# Altium PCB BottomBoard.PcbDoc (part 2 of 2)
Units mm, origin at the board's own origin, x right, y up, seen from the top; angles counter-clockwise.
Board outline 200 x 100 mm, 4 copper layers (Top Layer, Internal Plane 1, Internal Plane 2, Bottom Layer), stack 0.462 mm thick; 152 components, 162 nets, 488 pads, 15 vias.
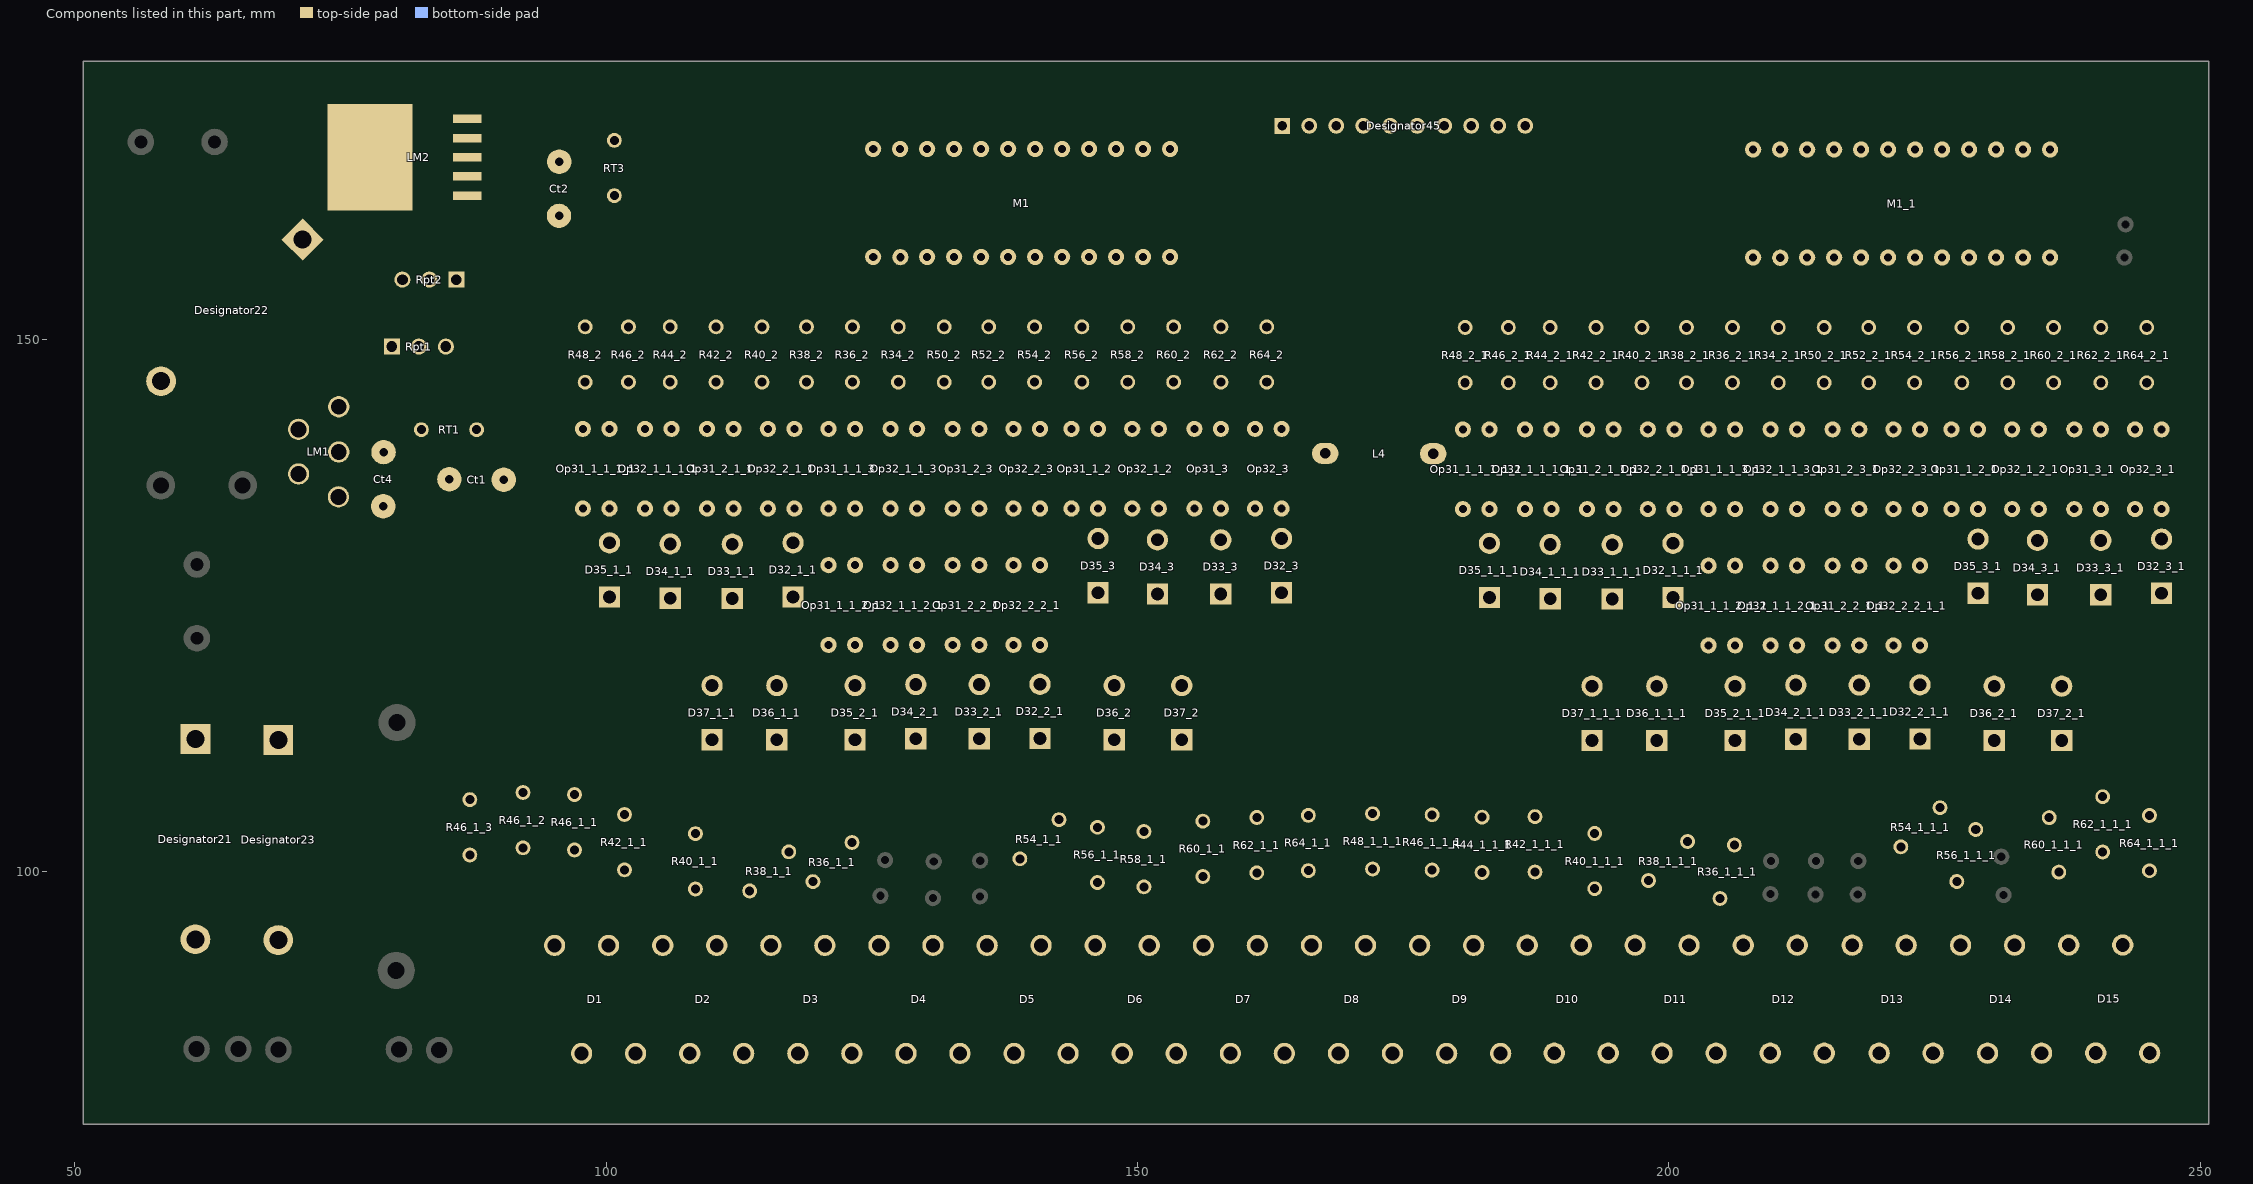
[diagram p4: the components of this part, seen from the top]

## Via types
v1: diameter 1, hole 0.7, Top Layer to Bottom Layer, 5 vias
v2: diameter 0.8, hole 0.5, Top Layer to Bottom Layer, 4 vias
v3: diameter 0.9, hole 0.6, Top Layer to Bottom Layer, 3 vias
v4: diameter 1, hole 0.65, Top Layer to Bottom Layer, 1 vias
v5: diameter 1.27, hole 0.711, Top Layer to Bottom Layer, 1 vias
v6: diameter 1, hole 0.6, Top Layer to Bottom Layer, 1 vias

## Nets (pads, with @x,y where several pads share a name; then routed paths per layer and width w, separated by ;. In a path a pad name is that pad's centre, name@x,y a point inside that pad or via, vN(x,y) a via of type N, cw(c..) or ccw(c..) an arc to the next point about the centre after c; other vN are vias at no path point) (continued)
copper on no net: | length 6655.3
  Top Layer w0.254: 64.831,136.3 65.796,136.3 ; 91.882,164.189 92.009,164.062 ; 103.616,139.653 103.656,139.693 ; 120.714,134.112 120.928,134.112 ; 120.888,139.653 120.928,139.693 ; 123.047,151.21 123.174,151.21 ; 123.174,133.811 123.174,134.112 ; 132.572,139.653 132.612,139.693 ; v2@136.763,132.722 v2(136.89,132.722) ; 138.287,139.653 138.327,139.693 ; 140.827,133.938 140.827,134.112 ; 143.748,139.653 143.788,139.693 ; 149.463,139.78 149.503,139.82 ; 155.305,139.653 155.345,139.693 ; 186.42,139.602 186.46,139.642 ; v3@190.002,169.396 v3(190.002,169.523) ; 203.518,134.061 203.732,134.061 ; 203.692,139.602 203.732,139.642 ; 205.851,151.159 205.978,151.159 ; 205.978,133.76 205.978,134.061 ; 215.376,139.602 215.416,139.642 ; v2@219.567,132.671 v2(219.694,132.671) ; 221.091,139.602 221.131,139.642 ; 223.631,133.887 223.631,134.061 ; 226.552,139.602 226.592,139.642 ; 232.267,139.729 232.307,139.769 ; 238.109,139.602 238.149,139.642
  Top Layer w0.6: 98.028,151.21 103.87,157.052 109.636,157.052 113.6,161.015 113.6,171.575 116.831,174.806 140.37,174.806 145.45,169.726 145.45,167.948 ; 102.092,151.21 106.283,155.401 110.347,155.401 115,160.053 115,170.825 118.118,173.943 138.694,173.943 142.91,169.726 142.91,167.948 ; 106.029,151.21 108.696,153.877 111.008,153.877 116.475,159.344 116.475,170.25 119.329,173.104 136.865,173.104 140.37,169.599 140.37,167.948 ; 110.347,151.21 112.125,152.988 117.7,158.562 117.7,169.5 120.441,172.241 135.062,172.241 137.83,169.472 137.83,167.948 ; 114.665,151.21 118.975,155.519 118.975,168.825 121.476,171.326 133.69,171.326 135.29,169.726 135.29,167.948 ; 118.856,151.21 120.675,153.028 120.675,168.5 122.612,170.437 132.166,170.437 132.75,169.853 132.75,167.948 ; 123.174,151.21 122.075,152.309 122.075,167.738 123.809,169.472 129.601,169.472 130.21,168.863 130.21,167.948 ; 123.428,155.274 127.492,151.21 ; 123.479,155.274 123.479,161.404 127.67,165.595 127.67,167.948 ; 127.68,157.763 127.68,155.34 131.81,151.21 ; 129.943,157.522 136.065,151.4 ; 132.496,157.534 138.821,151.21 140.319,151.21 ; 135.29,157.788 140.345,152.734 141.132,152.734 143.393,150.473 ; 137.83,157.788 142.961,152.657 147.635,152.657 148.955,151.337 ; 140.37,157.788 144.18,153.978 150.632,153.978 153.4,151.21 ; 142.91,157.788 145.577,155.121 153.934,155.121 157.845,151.21 ; 145.45,157.788 147.05,156.188 157.312,156.188 162.29,151.21 ; 147.99,167.948 147.99,165.789 153.07,160.709 153.07,157.788 ; 166.158,170.126 169.276,167.008 v3(178.343,167.008) ; 178.858,170.126 180.909,168.075 188.681,168.075 v3@190.002,169.396 ; 180.832,151.159 186.522,156.848 193.532,156.848 196.525,159.841 196.525,169.375 201.931,174.781 223.149,174.781 228.254,169.675 228.254,167.897 ; 184.896,151.159 189.418,155.68 194.371,155.68 197.8,159.109 197.8,168.875 202.817,173.892 221.498,173.892 225.714,169.675 225.714,167.897 ; 188.833,151.159 192.212,154.537 195.158,154.537 199.075,158.454 199.075,168.5 203.603,173.028 219.694,173.028 223.174,169.548 223.174,167.897 ; 193.151,151.159 194.929,152.937 195.514,152.937 200.55,157.973 200.55,168.25 204.414,172.114 217.942,172.114 220.634,169.421 220.634,167.897 ; 197.469,151.159 202,155.689 202,167.925 205.325,171.25 216.519,171.25 218.094,169.675 218.094,167.897 ; 201.66,151.159 203.475,152.973 203.475,167.68 206.131,170.336 214.437,170.336 215.554,169.218 215.554,167.897 ; 205.978,151.159 205.064,152.073 205.064,167.872 206.613,169.421 212.405,169.421 213.014,168.812 213.014,167.897 ; 210.296,151.159 206.275,155.18 206.275,160.95 210.474,165.149 210.474,167.897 ; 210.484,157.712 210.484,155.289 214.614,151.159 ; 212.747,157.471 218.869,151.349 ; 215.783,157.864 215.783,156.645 221.269,151.159 223.123,151.159 ; 218.094,157.737 218.094,156.721 222.133,152.683 223.86,152.683 226.146,150.397 ; 220.634,157.737 220.888,157.737 225.943,152.683 230.362,152.683 231.759,151.286 ; 223.174,157.737 226.984,153.927 233.436,153.927 236.204,151.159 ; 225.714,157.737 228.508,154.943 236.865,154.943 240.649,151.159 ; 228.254,157.737 229.905,156.086 238.313,156.086 243.24,151.159 244.967,151.159 ; 230.794,167.897 230.794,165.738 235.874,160.658 235.874,157.737
  Top Layer w0.8: 98.409,151.21 100.314,149.305 100.314,141.612 ; 102.092,151.21 103.997,149.305 103.997,143.771 106.156,141.612 ; 106.156,151.21 108.315,149.051 108.315,145.295 111.998,141.612 ; 117.713,141.612 119.437,143.336 123.047,143.336 125.333,145.622 125.333,148.543 127.302,150.511 127.302,150.892 ; 123.428,141.612 125.533,143.717 127.746,143.717 129.397,145.368 129.397,148.924 131.683,151.21 ; 129.578,141.612 133.715,145.749 133.715,149.051 136.065,151.4 ; 135.112,141.612 137.906,144.406 137.906,148.797 140.319,151.21 ; v2(136.89,132.722) 140.827,128.785 ; 140.827,141.612 142.097,142.882 142.097,148.924 144.447,151.273 ; 146.542,142.066 146.542,148.924 148.955,151.337 ; 152.003,141.612 152.003,150.194 153.019,151.21 ; 153.07,157.788 159.674,157.788 165.415,152.048 v5@165.415,145.6 ; 157.845,141.612 159.242,143.009 159.242,149.559 157.845,150.956 ; 162.29,151.21 163.687,149.813 163.687,141.612 ; 181.213,151.159 183.118,149.254 183.118,141.561 ; 184.896,151.159 186.801,149.254 186.801,143.72 188.96,141.561 ; 188.96,151.159 191.119,149 191.119,145.244 194.802,141.561 ; 200.517,141.561 201.206,141.561 202.93,143.285 205.851,143.285 208.137,145.571 208.137,148.492 210.106,150.46 210.106,150.841 ; 206.232,141.561 208.337,143.666 210.55,143.666 212.201,145.317 212.201,148.873 214.487,151.159 ; 212.382,141.561 212.763,141.561 216.519,145.317 216.519,149 218.869,151.349 ; 217.916,141.561 220.71,144.355 220.71,148.746 223.123,151.159 ; v2(219.694,132.671) 223.631,128.734 ; 223.631,141.561 224.901,142.831 224.901,148.873 227.175,151.146 ; 229.346,142.015 229.346,148.873 231.759,151.286 ; 234.807,141.561 234.807,150.143 235.823,151.159 ; 240.649,141.561 242.046,142.958 242.046,149.762 240.649,151.159 ; 244.967,151.159 246.875,149.251 246.875,142.071 246.364,141.561
  Top Layer w1: 97.025,101.99 97.025,99.475 103,93.5 103,91.3 106.275,88.025 107.865,86.435 107.865,82.84 ; 103.656,139.693 103.656,141.612 ; v1(107.147,109.985) 107.147,108.436 111.617,103.966 124.368,103.966 126.197,102.137 126.197,100.816 ; 108.4,98.315 110.035,98.315 113,95.35 113,91.725 118.04,86.685 118.04,82.84 ; v1@109.204,108.588 112.176,105.617 125.384,105.617 128.254,102.746 128.254,95.501 130.755,93 ; 109.498,139.653 109.498,141.612 ; 109.966,112.348 107.553,114.761 107.553,118.698 108.442,119.587 109.839,119.587 113.903,123.651 113.903,132.795 113.522,133.176 113.522,135.462 113.903,135.843 118.983,135.843 120.714,134.112 ; 109.966,116.793 111.871,114.888 112.887,113.872 112.887,111.967 116.189,108.665 127.442,108.665 133.175,102.931 133.175,91.8 135.625,89.35 141.875,89.35 143.47,87.755 143.47,82.84 ; 109.966,117.451 115.427,122.912 115.427,131.652 116.443,132.668 122.031,132.668 123.174,133.811 ; 110.03,112.411 115.3,107.141 126.553,107.141 130.871,102.823 130.871,100.918 ; 115.213,139.653 115.213,141.612 ; 116.062,112.348 116.062,113.999 114.03,116.031 114.03,118.444 119.872,124.286 119.872,126.953 118.602,128.223 118.602,128.959 120.152,130.509 123.167,130.509 126.77,134.112 ; 116.062,117.428 118.348,115.142 130.032,115.142 132.191,112.983 132.191,109.096 137.221,104.067 137.221,98.254 140.95,94.525 140.95,92.775 ; 116.062,117.451 118.071,119.46 124.317,119.46 125.079,120.222 125.079,129.62 129.27,133.811 ; 116.189,112.348 118.348,110.189 128.305,110.189 135.189,103.305 135.189,100.918 ; 119.456,99.006 123.425,95.037 123.425,90.9 125.65,88.675 127.4,88.675 128.215,87.86 128.215,82.84 ; 120.928,139.693 120.928,141.612 ; 125.75,92.975 125.75,97.55 ; 126.77,139.78 126.77,141.612 ; 132.612,134.112 131.048,132.548 131.048,127.588 132.191,126.445 134.604,126.445 136.763,124.286 136.763,120.095 137.525,119.333 142.605,119.333 147.812,114.126 147.812,109.987 142.638,104.813 ; 132.612,139.693 132.612,141.612 ; 135.112,134.112 135.112,132.541 136.763,130.89 136.763,127.842 139.43,125.175 140.573,125.175 147.812,117.936 ; 138.327,134.112 143.494,128.945 143.494,125.048 145.145,123.397 149.844,123.397 151.876,121.365 151.876,116.666 154.162,114.38 154.162,112.348 ; 138.327,139.693 138.327,141.612 ; 140.827,133.938 145.78,128.985 152.765,128.985 154.289,127.461 154.289,117.361 156.95,114.7 156.95,111.1 154.907,109.057 151.946,106.096 150.546,106.096 148.675,104.225 148.675,95.43 151.105,93 ; 143.788,139.693 143.788,141.612 ; 146.271,104.076 154.175,111.979 ; 147.916,117.451 147.916,117.209 150.251,114.874 150.251,110.376 144.275,104.4 144.275,97.177 143.475,96.377 143.475,92.125 146.15,89.45 150.35,89.45 153.645,86.155 153.645,82.84 ; 149.503,139.82 149.503,141.612 ; 150.6,98.515 153.7,95.415 153.7,88.858 154.908,87.65 157.35,87.65 158.74,86.26 158.74,82.84 ; 155.345,139.693 155.345,141.612 ; 161.224,99.84 163.8,97.264 163.8,91.175 167.025,87.95 167.525,87.95 168.915,86.56 168.915,82.84 ; 172.12,100.24 172.12,96.405 174.375,94.15 174.375,90.9 179.09,86.185 179.09,82.84 ; 176.642,92.967 177.725,94.05 177.725,100.09 ; 182.433,99.915 182.433,96.292 184.1,94.625 184.1,88.506 185.306,87.3 187.85,87.3 189.215,85.935 189.215,82.865 ; 186.46,139.642 186.46,141.561 ; 186.667,92.967 187.411,93.711 187.411,99.915 ; 192.302,139.602 192.302,141.561 ; 192.77,112.297 190.357,114.71 190.357,118.647 191.246,119.536 192.643,119.536 196.707,123.6 196.707,132.744 196.326,133.125 196.326,135.411 196.707,135.792 201.787,135.792 203.518,134.061 ; 192.77,116.742 194.675,114.837 195.691,113.821 195.691,111.916 198.993,108.614 211.947,108.614 215.732,104.829 215.732,94.887 214.9,94.055 214.9,88.465 215.376,87.989 222.996,87.989 224.75,86.235 224.75,83.239 ; 192.77,117.4 198.231,122.861 198.231,131.601 199.247,132.617 204.835,132.617 205.978,133.76 ; 192.775,98.475 194.575,96.675 194.575,87.475 199.413,82.637 ; 192.834,112.36 198.104,107.09 210.931,107.09 213.827,104.194 213.827,100.867 ; v1(192.847,108.969) 192.847,106.506 195.077,104.275 208.158,104.275 209.636,102.797 209.636,100.816 ; v1@194.802,107.928 197.165,105.566 209.534,105.566 211.875,103.225 211.875,93 ; 197.177,92.977 197.95,93.75 197.95,98.9 198.131,99.081 ; 198.017,139.602 198.017,141.561 ; 198.866,112.297 198.866,113.948 196.834,115.98 196.834,118.393 202.676,124.235 202.676,126.902 201.406,128.172 201.406,128.908 202.956,130.458 205.971,130.458 209.574,134.061 ; 198.866,117.377 201.152,115.091 212.836,115.091 214.995,112.932 214.995,110.646 219.694,105.947 219.694,95.631 221.839,93.486 221.839,93.028 ; 198.866,117.4 200.875,119.409 207.121,119.409 207.883,120.171 207.883,129.569 212.074,133.76 ; 198.993,112.297 201.152,110.138 212.709,110.138 217.891,104.956 217.891,100.867 ; 203.732,139.642 203.732,141.561 ; 204.814,97.42 204.814,89.661 209.54,84.935 209.54,82.865 ; 207.08,93.028 209.45,95.398 209.45,97.45 ; 209.574,139.729 209.574,141.561 ; 215.416,134.061 213.852,132.497 213.852,127.537 214.995,126.394 217.408,126.394 219.567,124.235 219.567,120.044 220.329,119.282 225.409,119.282 230.616,114.075 230.616,111.166 225.387,105.937 ; 215.416,139.642 215.416,141.561 ; 217.916,134.061 217.916,131.984 219.567,130.333 219.567,127.791 222.234,125.124 222.926,125.124 230.165,117.885 230.616,117.885 ; 221.131,134.061 226.298,128.894 226.298,124.997 227.949,123.346 234.68,116.615 236.966,114.329 236.966,112.297 ; 221.131,139.642 221.131,141.561 ; 223.631,133.887 228.584,128.934 235.569,128.934 237.093,127.41 237.093,117.631 ; 226.592,139.642 226.592,141.561 ; 228.833,103.782 237.157,112.106 ; 230.72,117.4 233.537,114.583 233.537,111.408 224.622,102.492 224.622,91.443 227.543,88.522 233.258,88.522 234.818,86.962 234.818,82.868 ; 231.338,98.088 235.188,94.237 235.188,90.732 237.424,88.497 238.795,88.497 240.167,87.125 240.167,82.63 ; 232.278,93.028 230.201,93.028 229.397,93.831 229.397,96.168 229.397,102.061 232.394,105.058 233.41,105.058 239.125,110.773 239.125,115.599 237.324,117.4 ; 232.307,139.769 232.307,141.561 ; v6(234.85,164.475) 239.875,164.475 242.975,160.85 244.65,160.85 248.475,157.025 248.475,140.4 247.7,139.625 242.07,139.625 ; 238.149,139.642 238.149,141.561
  Top Layer w1.2: 71.063,141.567 76.219,141.567 79.944,145.291 79.944,149.533 ; 74.838,139.246 80.071,139.246 82.458,136.859 85.633,136.859 ; 78.148,143.437 87.818,143.437 87.818,141.532 ; 80.452,139.373 82.611,141.532 ; 86.929,170.779 84.883,170.779 84.135,170.031 84.135,167.872 84.828,167.179 86.929,167.179 97.147,167.179 100.772,163.554
  Top Layer w1.4: 97.814,141.612 99.773,139.653 159.242,139.653 161.147,141.558 ; 123.174,148.543 v2(125.46,150.829) ; 180.618,141.561 182.577,139.602 242.046,139.602 ; 205.978,148.492 v2(208.264,150.778) ; 242.07,139.625 243.951,141.507
  Top Layer w1.5: 82.611,149.406 85.887,149.406 90.358,144.936 90.358,136.706 ; 110.347,146.003 123.174,146.003 123.174,148.543 ; 193.151,145.952 205.978,145.952 205.978,148.492
  Top Layer w1.6: 80.833,155.655 82.738,155.655 85.582,152.81 86.616,152.81 97.814,141.612 ; 82.814,155.655 85.125,157.966 89.469,157.966 92.009,160.506 92.009,164.062 ; 85.913,155.655 96.149,155.655 103.312,162.817 103.312,167.745 102.078,168.979 86.929,168.979 ; 86.929,165.379 90.692,165.379 91.882,164.189 ; 92.009,161.649 95.565,161.649
  Top Layer w1.8: 81.01,151.692 83.246,149.457
  Top Layer w1.9: 58.1,146.098 58.1,136.3 73.492,151.692 81.01,151.692 ; 65.796,136.3 70.022,136.3 ; 70.022,136.325 71.063,137.367
  Top Layer w2.2: 63.154,159.185 63.154,168.609 ; 74.457,134.827 74.618,134.988 ; 75.042,134.988 75.711,134.319 79.029,134.319 ; 81.976,159.134 57.084,159.134 54.061,156.112 54.061,81.514 56.225,79.35 82.625,79.35 84.282,81.007 84.282,83.156 ; 82.001,159.134 86.001,163.135
  Top Layer w3: 61.35,112.457 69.035,112.457 80.248,101.244 80.248,90.656 ; 61.458,83.264 61.458,93.675 ; 61.493,121.913 80.075,121.913 ; 69.165,83.192 69.165,93.975 ; 74.813,135.217 74.813,131.262 80.325,125.75 80.325,113.975
  Bottom Layer w0.254: 97.549,141.612 97.814,141.612 ; 100.314,130.509 100.314,130.89 ; 106.029,130.509 106.029,130.786 ; 110.297,146.003 110.347,146.003 ; 110.347,151.21 110.601,151.21 ; 111.871,133.985 111.998,134.112 ; 114.665,151.083 114.665,151.21 114.919,151.21 ; 118.856,151.083 118.856,151.21 ; 123.174,151.083 123.174,151.21 ; 125.13,157.788 125.13,158.22 ; 129.143,117.05 129.143,117.555 ; 150.53,167.948 150.53,168.304 ; 153.07,167.948 153.223,167.948 ; 161.06,141.264 161.06,141.612 ; 183.118,130.458 183.118,130.839 ; 188.833,130.458 188.833,130.735 ; 193.151,151.159 193.405,151.159 ; 194.675,133.934 194.802,134.061 ; 197.469,151.032 197.469,151.159 197.723,151.159 ; 201.66,151.032 201.66,151.159 ; 205.978,151.032 205.978,151.159 ; 207.934,157.661 207.934,157.737 ; 211.947,116.999 211.947,117.504 ; 230.794,157.737 230.794,158.296 ; 233.334,157.737 233.334,158.068 ; 233.334,167.897 233.334,168.228 ; 243.864,141.213 243.864,141.561 244.031,141.561 ; 244.967,145.952 244.967,146.104
  Bottom Layer w0.56: 190.916,168.075 192.643,169.802
  Bottom Layer w0.6: 125.13,158.22 132.649,165.738 159.231,165.738 163.618,170.126 ; 147.99,157.788 149.54,156.239 164.856,156.239 176.318,167.701 176.318,170.126 ; 150.53,168.304 155.686,173.46 167.905,173.46 171.238,170.126 ; 150.708,157.864 152.664,159.82 166.17,159.82 173.778,167.428 173.778,170.126 ; 153.223,167.948 157.363,172.088 166.736,172.088 168.698,170.126 ; v3@178.343,166.932 198.663,166.932 207.934,157.661 ; 181.29,169.929 183.144,168.075 190.916,168.075 ; 183.938,170.126 187.602,173.79 234.604,173.79 238.516,169.879 238.516,163.249 233.334,158.068 ; 186.478,170.539 188.409,172.469 233.791,172.469 237.297,168.964 237.297,164.799 230.794,158.296 ; v3(190.002,169.523) 191.627,171.149 232.623,171.149 235.874,167.897 ; 192.643,169.802 231.759,169.802 233.334,168.228
  Bottom Layer w0.78: 110.601,151.21 112.633,149.178 ; 193.405,151.159 195.437,149.127
  Bottom Layer w0.8: 95.565,161.649 112.799,161.649 119.125,167.975 ; 112.633,149.178 112.633,144.225 113.649,143.209 113.649,139.78 115.808,137.621 116.977,137.621 119.364,135.233 119.364,132.849 123.428,128.785 ; 114.919,151.21 116.57,149.559 116.57,145.495 119.237,142.828 119.237,139.399 120.888,137.748 122.539,137.748 125.079,135.208 125.079,132.976 129.27,128.785 ; 118.856,151.083 120.888,149.051 120.888,144.987 122.158,143.717 123.682,143.717 125.079,142.32 125.079,139.907 126.222,138.764 127.518,138.764 130.921,135.36 130.921,132.976 135.112,128.785 ; 123.174,151.083 125.079,149.178 125.079,145.368 126.476,143.971 129.397,143.971 130.921,142.447 130.921,139.399 131.683,138.637 133.461,138.637 136.763,135.335 v2@136.763,132.722 ; 138.327,128.898 142.224,132.795 v1(142.224,139.653) ; 195.437,149.127 195.437,144.174 196.453,143.158 196.453,139.729 198.612,137.57 199.959,137.57 202.168,135.36 202.168,132.798 206.232,128.734 ; 197.723,151.159 199.374,149.508 199.374,145.444 202.041,142.777 202.041,139.348 203.692,137.697 205.115,137.697 207.883,134.928 207.883,132.925 212.074,128.734 ; 201.66,151.032 203.692,149 203.692,144.936 204.962,143.666 206.486,143.666 207.883,142.269 207.883,139.856 209.026,138.713 210.271,138.713 213.725,135.258 213.725,132.925 217.916,128.734 ; 205.978,151.032 207.883,149.127 207.883,145.85 209.814,143.92 212.201,143.92 213.725,142.396 213.725,139.348 214.487,138.586 216.265,138.586 219.567,135.284 v2@219.567,132.671 ; 207.934,167.897 207.934,165.541 209,164.475 v6(234.85,164.475) ; 221.131,128.847 225.028,132.744 v3(225.028,139.602) ; 235.874,157.737 242.859,157.737 246.975,153.622 246.975,147.959 244.967,145.952
  Bottom Layer w1: 87.157,101.49 87.157,93.373 97.69,82.84 ; 87.183,106.625 87.183,115.958 97.012,125.787 100.314,125.787 100.314,127.334 97.814,129.834 97.814,134.112 ; 92.186,102.225 92.186,95.964 95.15,93 ; 92.186,107.3 92.186,113.561 95.647,117.022 99.6,120.975 102.175,120.975 106.029,124.829 106.029,125.683 106.029,127.588 103.656,129.961 103.656,134.112 ; 97.012,106.975 97.012,110.062 111.871,124.921 111.871,125.66 111.871,127.588 109.498,129.961 109.498,134.112 ; 100.23,93 94.599,98.631 94.599,110.316 108.696,124.413 108.696,127.842 106.029,130.509 ; 100.314,130.509 102.981,127.842 102.981,124.581 101.425,123.025 97.925,123.025 89.57,114.67 89.57,111.17 89.57,94.73 94.6,89.7 100.525,89.7 102.77,87.455 102.77,82.84 ; 100.314,130.89 100.314,134.112 ; 101.711,104.875 101.711,105.667 103.413,107.369 114.669,107.369 119.267,111.967 123.047,111.967 123.428,112.348 123.428,113.999 120.928,116.499 120.928,121.285 ; 106.156,130.913 106.156,134.112 ; v1@107.147,110.011 111.287,110.011 112.1,110.824 112.1,118.799 117.586,124.286 117.586,125.787 117.586,127.461 115.213,129.834 115.213,134.112 ; 108.4,103.522 109.529,104.651 115.926,104.651 120.35,109.075 127.395,109.075 129.143,110.824 129.143,112.452 129.143,114.126 126.77,116.499 126.77,121.285 ; v1@109.23,108.614 112.075,108.614 113.649,110.189 113.649,118.317 119.999,124.667 119.999,127.029 118.856,128.172 118.856,128.988 117.586,130.258 ; 110.35,92.8 105.675,97.475 105.675,103.925 107.722,105.972 115.272,105.972 119.675,110.375 125.393,110.375 126.349,111.332 126.349,114.126 123.428,117.047 ; 111.871,130.636 114.411,128.096 114.411,124.794 99.197,109.579 99.197,97.428 102.475,94.15 102.475,92.25 105.175,89.55 110.725,89.55 112.945,87.33 112.945,82.84 ; 111.871,130.763 111.871,133.985 ; 113.506,98.131 115.5,96.137 115.5,93 ; 117.188,101.883 117.688,101.883 122.184,106.379 133.944,106.379 135.112,107.547 135.112,112.452 135.112,114.253 132.612,116.753 132.612,121.285 ; 117.586,130.89 117.586,133.985 ; 119.125,167.975 124.924,167.975 125.1,168.151 ; 120.58,93 117.434,96.146 117.434,99.495 123.047,105.109 135.544,105.109 137.881,107.445 137.881,114.786 135.62,117.047 135.112,117.047 ; 120.928,128.785 122.76,126.953 136.495,126.953 138.327,128.785 ; 123.053,102.472 124.419,103.839 136.789,103.839 140.827,107.877 140.827,112.475 140.827,114.126 138.327,116.626 138.327,121.285 ; 123.12,82.84 123.12,87.78 121.35,89.55 114.1,89.55 113.075,90.575 113.075,94.975 111.15,96.9 111.15,100.9 113.555,103.305 116.63,103.305 121.075,107.75 130.667,107.75 131.988,109.071 131.988,114.205 129.143,117.05 ; 123.428,117.451 123.428,121.285 ; 126.77,126.953 126.77,128.785 ; 129.143,117.555 129.143,121.365 ; 130.55,97.325 131,97.325 133.325,95 133.325,90.925 134.65,89.6 137.15,89.6 138.39,88.36 138.39,82.84 ; 132.612,126.953 132.612,128.785 ; 133.295,82.84 133.295,86.93 131.525,88.7 126.197,88.7 123.428,91.469 123.428,95.482 123.428,100.689 125.308,102.569 137.819,102.569 143.113,107.863 143.113,114.888 140.827,117.174 ; 135.112,117.555 135.112,121.285 ; 135.189,97.4 135.189,93.936 136.25,92.875 ; 138.931,101.156 138.931,99.494 140.675,97.75 142.125,97.75 143.625,96.25 143.625,91.5 148.565,86.56 148.565,82.84 ; 140.827,117.578 140.827,121.285 ; 143.788,134.112 143.788,130.469 146.288,127.969 146.288,126.191 146.288,124.413 145.145,123.27 145.145,111.205 150.632,105.718 150.632,103.55 ; 146.225,93 146.225,98.915 ; 146.288,131.017 148.955,128.35 148.955,120.857 149.971,119.841 149.971,109.173 153.55,105.594 153.55,91.4 156.225,88.725 160.7,88.725 163.82,85.605 163.82,82.84 ; 146.288,131.294 146.288,134.112 ; 149.503,134.112 149.503,130.215 151.876,127.842 151.876,126.064 ; 151.749,126.064 151.749,110.316 156.194,105.871 156.194,104.425 ; 151.876,130.89 154.543,128.223 154.543,122.982 158.48,119.045 158.48,98.995 161.28,96.195 161.28,93 ; 152.003,131.294 152.003,134.112 ; 155.345,134.112 155.345,130.342 157.845,127.842 157.845,126.064 157.845,123.48 161.224,120.101 161.224,105.047 ; 156.2,93.125 156.2,99.49 ; 157.845,130.763 161.05,127.558 161.05,123.85 163.408,121.492 163.408,94.949 163.95,94.407 163.95,91.05 167.443,87.557 173.118,87.557 173.995,86.68 173.995,82.84 ; 157.845,131.167 157.845,134.112 ; 161.06,134.112 161.06,130.342 163.56,127.842 163.56,126.191 166.05,123.701 166.05,119.002 166.05,105.247 ; 163.56,131.294 163.56,134.112 ; 163.791,131.294 169.504,125.581 169.504,118.037 169.504,94.951 171.455,93 ; 166.05,93 166.05,100.04 ; 172.171,105.275 172.171,113.946 183.118,124.893 183.118,125.736 183.118,127.283 180.618,129.783 180.618,134.061 ; 177.683,105.297 177.683,113.333 188.833,124.483 188.833,125.632 188.833,127.537 186.46,129.91 186.46,134.061 ; 181.63,93 180.325,94.305 180.325,113.325 191.5,124.5 191.5,127.791 188.833,130.458 ; 182.483,105.075 182.483,112.678 194.675,124.87 194.675,125.609 194.675,127.537 192.302,129.91 192.302,134.061 ; 183.118,130.458 185.785,127.791 185.785,124.685 174.584,113.484 174.584,98.966 178.725,94.825 178.725,90.475 184.17,85.03 184.17,82.84 ; 183.118,130.839 183.118,134.061 ; 187.349,105.098 188.908,106.658 196.631,106.658 201.889,111.916 205.851,111.916 206.232,112.297 206.232,113.948 203.732,116.448 203.732,121.234 ; 188.96,130.862 188.96,134.061 ; 191.755,93.025 190.484,94.296 190.484,104.778 190.789,105.083 197.19,105.083 202.245,110.138 208.01,110.138 209.153,111.281 209.153,114.075 206.232,116.996 ; v1@193.164,109.211 195.056,111.103 195.056,119.806 200.39,125.14 200.39,125.736 200.39,127.41 198.017,129.783 198.017,134.061 ; 193.175,103.661 198.003,103.661 203.21,108.868 210.042,108.868 211.947,110.773 211.947,112.401 211.947,114.075 209.574,116.448 209.574,121.234 ; 194.295,82.865 194.295,84.61 189.475,89.43 189.475,93.175 184.49,98.16 184.49,112.017 197.215,124.743 197.215,128.045 194.675,130.585 ; v1(194.675,108.055) 196.453,109.833 196.453,117.903 202.803,124.253 202.803,126.775 201.66,127.918 201.66,128.937 200.39,130.207 ; 194.675,130.712 194.675,133.934 ; 200.39,130.839 200.39,133.934 ; 201.859,102.717 205.47,106.328 216.138,106.328 217.916,108.106 217.916,112.401 217.916,114.202 215.416,116.702 215.416,121.234 ; 201.875,92.575 201.875,100.375 206.558,105.058 217.408,105.058 220.329,107.979 220.329,115.091 218.424,116.996 217.916,116.996 ; 203.732,128.734 205.564,126.902 219.299,126.902 221.131,128.734 ; 204.445,82.865 204.445,86.955 203.15,88.25 195.85,88.25 194.4,89.7 194.4,94.445 195.7,95.745 195.7,100.75 197.188,102.238 198.738,102.238 204.098,107.598 212.709,107.598 214.614,109.503 214.614,114.332 211.947,116.999 ; 206.082,102.368 207.502,103.788 218.424,103.788 223.631,108.995 223.631,112.424 223.631,114.075 221.131,116.575 221.131,121.234 ; 206.232,117.4 206.232,121.234 ; 209.574,126.902 209.574,128.734 ; 211.947,117.504 211.947,121.314 ; 213.737,97.738 214.9,96.575 214.9,89.685 219.79,84.795 219.79,82.865 ; 214.62,82.865 214.62,84.25 209.375,89.495 209.375,93.7 207.452,95.623 207.452,101.578 208.391,102.518 219.567,102.518 225.917,108.868 225.917,114.837 223.631,117.123 ; 215.416,126.902 215.416,128.734 ; 217.84,93.025 217.84,97.375 ; 217.916,117.504 217.916,121.234 ; 221.831,102.281 221.831,97.155 224.622,94.364 224.622,87.984 229.738,82.868 ; 223.631,117.527 223.631,121.234 ; 226.592,134.061 226.592,130.418 229.092,127.918 229.092,126.14 229.092,124.362 227.949,123.219 227.949,111.154 231.201,107.903 231.201,101.1 ; 227.233,92.765 227.233,99.02 ; 229.092,130.966 231.759,128.299 231.759,120.806 232.775,119.79 232.928,109.122 232.928,102.747 235.036,100.639 235.036,91.214 237.321,88.929 243.647,88.929 245.247,87.329 245.247,82.884 ; 229.092,131.243 229.092,134.061 ; 232.307,134.061 232.307,130.164 234.68,127.791 234.68,126.013 ; 234.553,126.013 234.553,110.265 235.798,109.02 235.798,105.027 ; 234.68,130.839 237.7,127.819 237.7,120.326 239.075,118.952 239.075,107.547 238.675,107.147 238.675,100.733 242.707,96.701 242.707,93.044 ; 234.807,131.243 234.807,134.061 ; 236.693,99.899 237.645,98.946 237.645,93.019 ; 238.149,134.061 238.149,130.291 240.649,127.791 240.649,126.013 ; 240.649,106.175 240.649,125.759 ; 240.649,130.712 242.758,128.604 242.758,101.553 ; 240.649,131.116 240.649,134.061 ; 243.864,134.061 243.864,130.291 246.364,127.791 246.364,126.14 246.364,121.441 245.298,120.374 245.298,105.134 ; 246.364,131.243 246.364,134.061 ; 246.595,131.243 248.422,129.416 248.422,120.577 247.482,119.637 247.482,101.045
  Bottom Layer w1.4: 74.838,139.416 74.838,143.692 ; v2(125.46,150.829) 127.492,148.797 ; v2(208.264,150.778) 210.296,148.746
  Bottom Layer w1.5: 98.028,146.003 110.347,146.003 ; 101.711,100.115 101.711,98.714 105.325,95.1 105.325,93 ; 127.492,148.797 127.492,146.003 180.925,146.003 ; 161.06,141.264 163.024,139.3 167.665,139.3 ; 178.229,139.171 180.618,141.561 ; 180.832,145.952 193.151,145.952 ; 210.296,148.746 210.296,145.952 244.815,145.952
  Bottom Layer w1.7: 54.925,139.416 74.838,139.416
  Bottom Layer w2: 61.493,128.847 90.972,128.847 94.15,132.025 94.15,142.124 98.028,146.003 ; 82.661,167.179 v4@85.405,167.179
  Bottom Layer w2.8: 61.046,173.282 76.54,173.282 82.661,167.161
  Bottom Layer w3: 54.594,128.763 61.75,128.763 ; 61.046,173.282 54.493,166.729 54.493,92.561 58.829,88.225 75.515,88.225 80.512,83.228 ; 65.395,83.264 65.395,87.475
  other v1: 109.23,108.639
  other v4: 85.405,167.11
  other v5: 165.45,146

## Keep-outs
Keep-Out Layer:
  lines w0.3: 52.389,77.605 249.789,77.605 249.789,167.317 241.615,175.492 59.903,175.492 52.389,167.978 52.389,77.605

## Other copper
Top Layer:
  text "-" at 76.981,82.491 h1.52
  text "+" at 86.938,82.212 h1.52

## Silkscreen, mask and mechanical layers (free items; w line width, h text height)
Top Overlay:
  lines w0.254: 67.173,81.613 59.934,81.613 ; 82.29,81.577 78.708,81.577 ; 59.934,81.613 70.943,81.613 70.943,84.915 59.934,84.915 59.934,81.613 ; 78.708,81.577 78.708,84.879 86.06,84.879 86.06,81.577 78.708,81.577

## Text inside footprints (layer, text, board x,y; h text height)
M1: Top Overlay "4067" at 136.48,159.988 h1.52 r90
M1_1: Top Overlay "4067" at 219.284,159.937 h1.52 r90
Op31_1_1_1_1: Top Overlay "NEC" at 99.814,135.912 h1.52 r90
Op31_1_1_1_1_1: Top Overlay "NEC" at 182.618,135.861 h1.52 r90
Op31_1_1_2_1: Top Overlay "NEC" at 122.928,123.085 h1.52 r90
Op31_1_1_2_1_1: Top Overlay "NEC" at 205.732,123.034 h1.52 r90
Op31_1_1_3: Top Overlay "NEC" at 122.928,135.912 h1.52 r90
Op31_1_1_3_1: Top Overlay "NEC" at 205.732,135.861 h1.52 r90
Op31_1_2: Top Overlay "NEC" at 145.788,135.912 h1.52 r90
Op31_1_2_1: Top Overlay "NEC" at 228.592,135.861 h1.52 r90
Op31_2_1_1: Top Overlay "NEC" at 111.498,135.912 h1.52 r90
Op31_2_1_1_1: Top Overlay "NEC" at 194.302,135.861 h1.52 r90
Op31_2_2_1: Top Overlay "NEC" at 134.612,123.085 h1.52 r90
Op31_2_2_1_1: Top Overlay "NEC" at 217.416,123.034 h1.52 r90
Op31_2_3: Top Overlay "NEC" at 134.612,135.912 h1.52 r90
Op31_2_3_1: Top Overlay "NEC" at 217.416,135.861 h1.52 r90
Op31_3: Top Overlay "NEC" at 157.345,135.912 h1.52 r90
Op31_3_1: Top Overlay "NEC" at 240.149,135.861 h1.52 r90
Op32_1_1_1_1: Top Overlay "NEC" at 105.656,135.912 h1.52 r90
Op32_1_1_1_1_1: Top Overlay "NEC" at 188.46,135.861 h1.52 r90
Op32_1_1_2_1: Top Overlay "NEC" at 128.77,123.085 h1.52 r90
Op32_1_1_2_1_1: Top Overlay "NEC" at 211.574,123.034 h1.52 r90
Op32_1_1_3: Top Overlay "NEC" at 128.77,135.912 h1.52 r90
Op32_1_1_3_1: Top Overlay "NEC" at 211.574,135.861 h1.52 r90
Op32_1_2: Top Overlay "NEC" at 151.503,135.912 h1.52 r90
Op32_1_2_1: Top Overlay "NEC" at 234.307,135.861 h1.52 r90
Op32_2_1_1: Top Overlay "NEC" at 117.213,135.912 h1.52 r90
Op32_2_1_1_1: Top Overlay "NEC" at 200.017,135.861 h1.52 r90
Op32_2_2_1: Top Overlay "NEC" at 140.327,123.085 h1.52 r90
Op32_2_2_1_1: Top Overlay "NEC" at 223.131,123.034 h1.52 r90
Op32_2_3: Top Overlay "NEC" at 140.327,135.912 h1.52 r90
Op32_2_3_1: Top Overlay "NEC" at 223.131,135.861 h1.52 r90
Op32_3: Top Overlay "NEC" at 163.06,135.912 h1.52 r90
Op32_3_1: Top Overlay "NEC" at 245.864,135.861 h1.52 r90